# Altium PCB PCB1.PcbDoc
Units mil, origin at the board's own origin, x right, y up, seen from the top; angles counter-clockwise.
Board outline 1450 x 2400 mil, 2 copper layers (Top Layer, Bottom Layer); 6 components, 10 nets, 66 pads, 0 vias.
Unrouted connection lines stored in the file: 2.
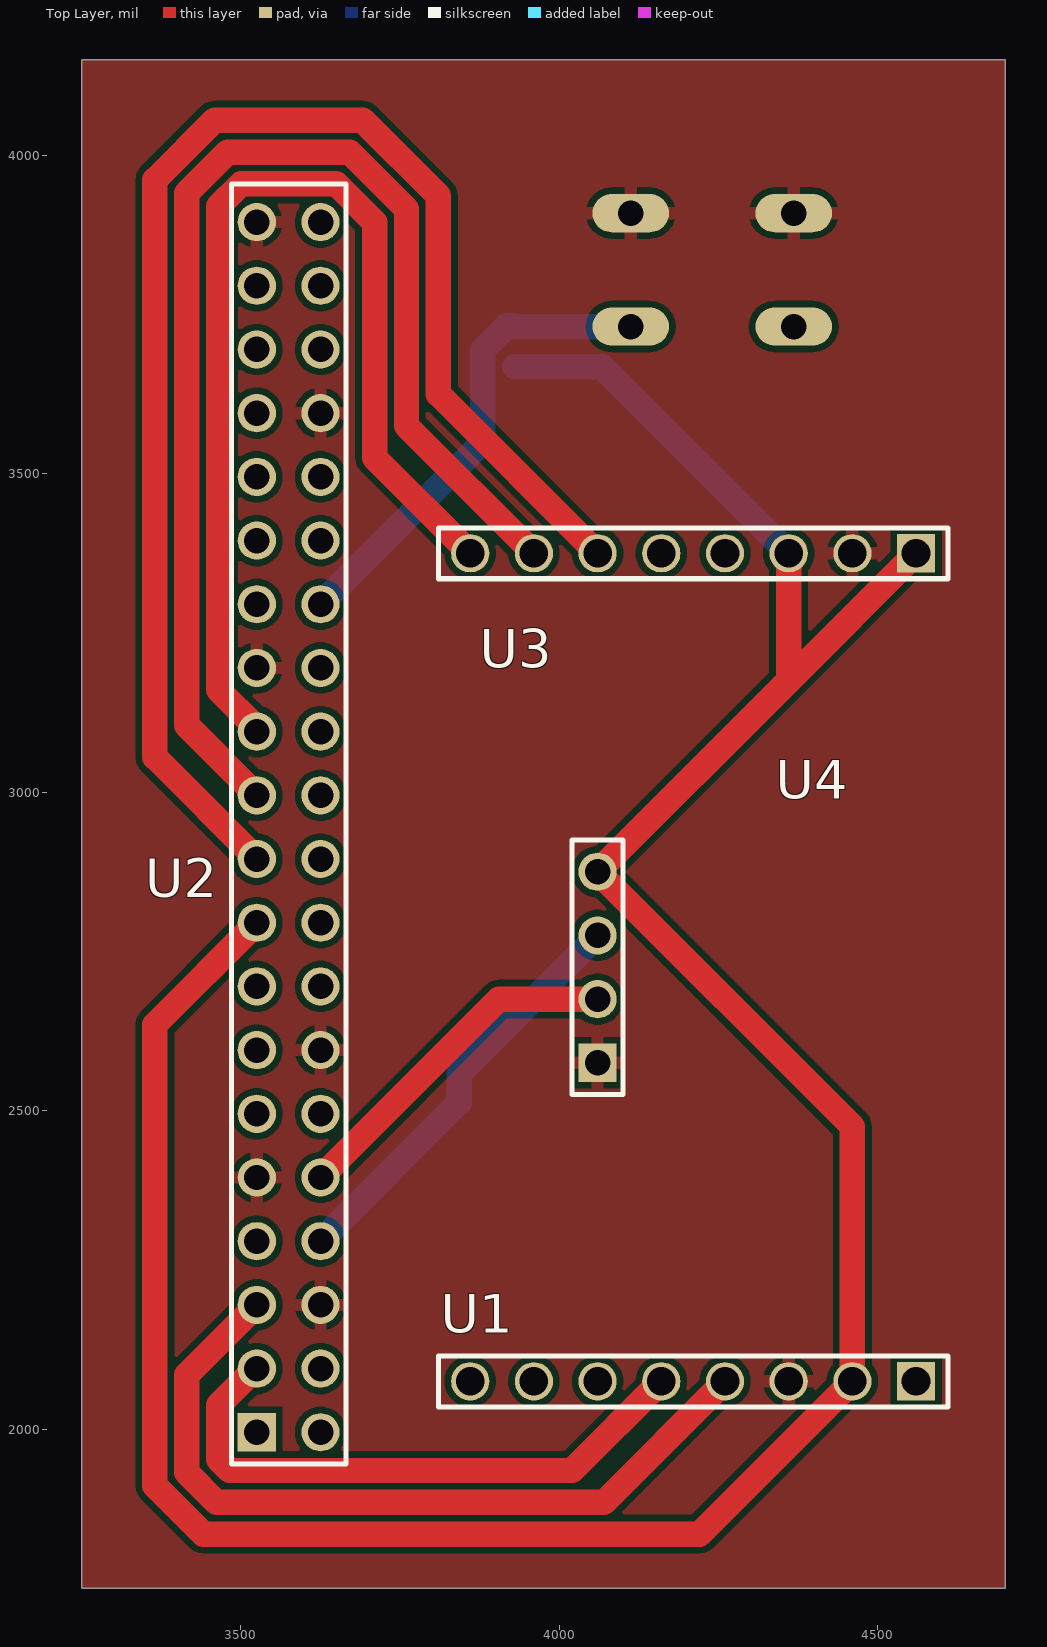
[diagram p0: Top Layer view]
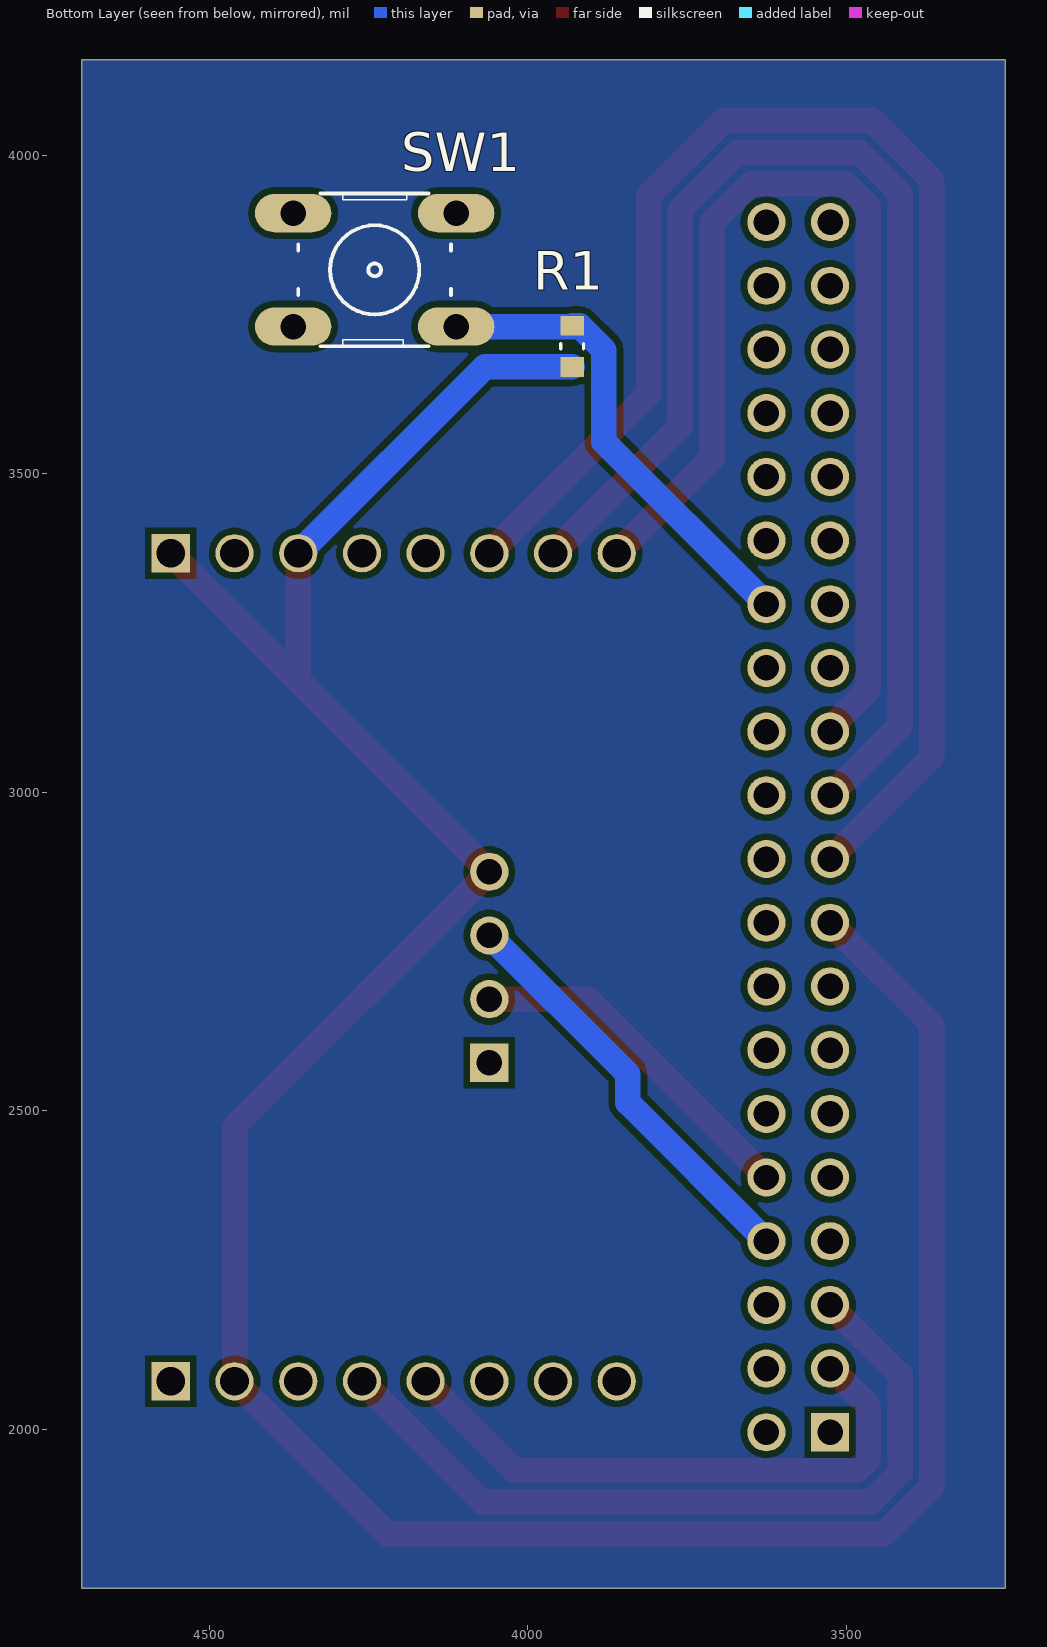
[diagram p1: Bottom Layer view, seen from below]
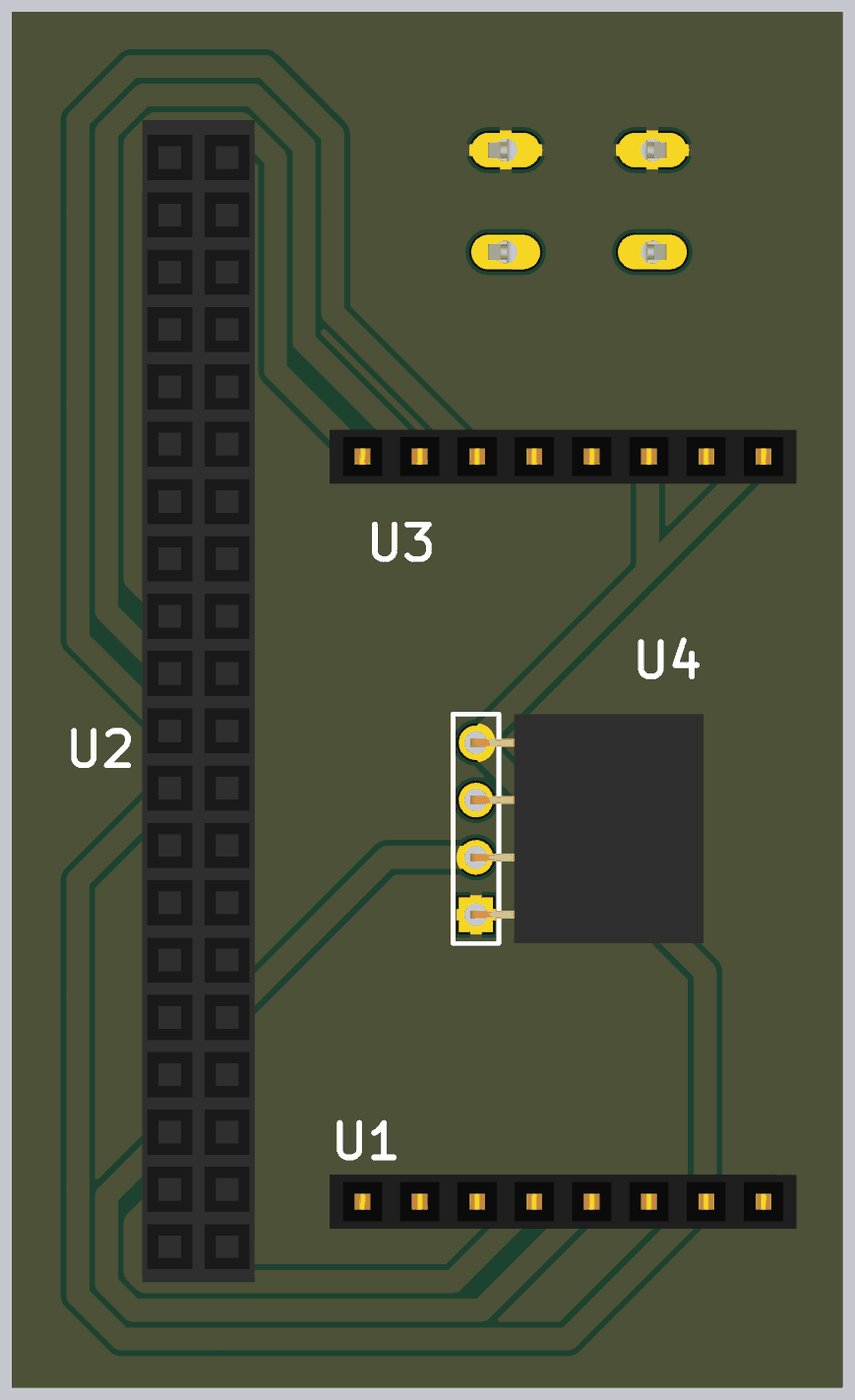
[diagram p2: 3D render of the assembled board from above, using the file's embedded part models]

## Layer stack, top to bottom
Top Solder: solder mask 0.4, Solder Resist, Dk 3.5
Top Layer: signal copper 1.4
Dielectric 1: dielectric 12.6, FR-4, Dk 4.8
Bottom Layer: signal copper 1.4
Bottom Solder: solder mask 0.4, Solder Resist, Dk 3.5

## Board outline
3250,1750 3250,4150 4700,4150 4700,1750

## Design rules (kind name [scope] priority, off if disabled: settings)
Clearance [All] p1: gap=10 ignorepadtopadclearanceinfootprint=FALSE except(0: Arc-Hole Track-Hole SMDPad-Hole THPad-Hole Via-Hole Fill-Hole Poly-Hole Region-Hole Text-Hole)
PlaneConnect [All] p1: planeconnectstyle=Relief reliefexpansion=20 reliefentries=4 reliefconductorwidth=20 reliefairgap=10
PolygonConnect [All] p1: connectstyle=Relief reliefconductorwidth=20 reliefentries=4 polygonreliefangle="90 Angle" airgapwidth=10
RoomDefinition Sheet1 [InComponentClass('Sheet1')] p1: confinementstyle=ConfineIn formatcopy=TRUE lockcomponents=FALSE outline 0,0 2000,0 2000,1000 0,1000
RoutingVias [All] p1: holewidth=28 width=50 viastyle="Through Hole" minholewidth=28 minwidth=50 maxholewidth=28 maxwidth=50
SolderMaskExpansion [All] p1: expansion=4 istentingtop=FALSE
Width [All] p1: maxlimit=100 minlimit=10 preferedwidth=40 minimp=50.000000 maximp=50.000000 favimp=50.000000
29 further rules are at their usual default settings.

## Components (designator, comment, footprint, x,y, rotation, side; value= is the part's Value field where it differs from the comment)
R1 "RT0603FRD0710KL" RESC1608X55N 3930,3700 r270 bottom
SW1 "SKHHANA010" SW_SKHHANA010 4240,3820 r180 bottom
U1 "GY-87" single8pinfemale 4560,2075 r90 top
U2 "beagleYAI" 40pinfemale 3525,1995 r0 top
U3 "ADXL345" single8pinfemale 4560,3375 r90 top
U4 "neo6m" single4pinfemale 4060,2575 r0 top

## Footprints (in the part's own frame and the unit in brackets; to place one, negate y for a bottom-side part, rotate by r counter-clockwise, add the part's x,y. Pads: shape width x height; smd on the part's side, far side on the other; paste and mask are expansions set on the pad)
40pinfemale [mil]
  rect 60x60 hole 40: 1(0,0)
  round 60 hole 40: 2(100,0) 3(0,100) 4(100,100) 5(0,200) 6(100,200) 7(0,300) 8(100,300) 9(0,400) 10(100,400) 11(0,500) 12(100,500) 13(0,600) 14(100,600) 15(0,700) 16(100,700) 17(0,800) 18(100,800) 19(0,900) 20(100,900) 21(0,1000) 22(100,1000) 23(0,1100) 24(100,1100) 25(0,1200) 26(100,1200) 27(0,1300) 28(100,1300) 29(0,1400) 30(100,1400) 31(0,1500) 32(100,1500) 33(0,1600) 34(100,1600) 35(0,1700) 36(100,1700) 37(0,1800) 38(100,1800) 39(0,1900) 40(100,1900)
  silkscreen extent -40,-50 140,1960, body extent -48,-61 149,1967, height 539
RESC1608X55N [mm]
  rect 0.79x0.93 smd: 1(-0.82,0) 2(0.82,0)
  silkscreen extent -0.11,-0.45 0.11,0.45, body extent -0.83,-0.4 0.77,0.4, height 0.55
single4pinfemale [mil]
  rect 60x60 hole 40: 1(0,0)
  round 60 hole 40: 2(0,100) 3(0,200) 4(0,300)
  silkscreen extent -40,-50 40,350, body extent -10,-50 398,350, height 100
single8pinfemale [mil]
  rect 60x60 hole 45: 1(0,0)
  round 60 hole 45: 2(0,100) 3(0,200) 4(0,300) 5(0,400) 6(0,500) 7(0,600) 8(0,700)
  silkscreen extent -40,-50 40,750, body extent -48,-60 46,756, height 335
SW_SKHHANA010 [mil]
  oval 120x60 hole 40: 1(-128,89) 2(128,89) 3(-128,-89) 4(128,-89)
  silkscreen extent -120,-120 120,120, body extent -153,-122 159,122, height 374

## Part data
R1: "Res Thin Film 0603 10K Ohm 1% 0.1W(1/10W) Â±25ppm/C Molded SMD Paper T/R", Package="1608 Yageo", Check_prices=https://www.snapeda.com/parts/RT0603FRD0710KL/Yageo/view-part/?ref=eda, MF=Yageo, MP=RT0603FRD0710KL, SnapEDA_Link=https://www.snapeda.com/parts/RT0603FRD0710KL/Yageo/view-part/?ref=snap
SW1: "Switch Tactile N.O. SPST Round Button PC Pins 0.05A 12VDC 0.98N Thru-Hole Bulk", Package=None, Check_prices=https://www.snapeda.com/parts/SKHHANA010/ALPS/view-part/?ref=eda, MF=ALPS, MP=SKHHANA010, SnapEDA_Link=https://www.snapeda.com/parts/SKHHANA010/ALPS/view-part/?ref=snap
U1 U2 U3 U4: ComponentLink1Description=Purchase, ComponentLink2Description=Datasheet

## Nets (pads, with @x,y where several pads share a name; then routed paths per layer and width w, separated by ;. In a path a pad name is that pad's centre, name@x,y a point inside that pad or via, vN(x,y) a via of type N, cw(c..) or ccw(c..) an arc to the next point about the centre after c; other vN are vias at no path point)
GND: SW1.1 SW1.2 U1.3 U2.6 U2.9 U2.14 U2.25 U2.34 U2.39 U3.2 U4.1
NetR1_1: R1.1 SW1.4 U2.28 | length 753
  Bottom Layer w40: U2.28 3880,3550 3880,3694 3918.28,3732.28 R1.1 3931.28,3731 SW1.4
NetU1_4: U1.4 U2.5 | length 1251.8
  Top Layer w40: U2.5 3415,2085 3415,1931.86 3461.86,1885 4070,1885 U1.4
NetU1_5: U1.5 U2.3 | length 929
  Top Layer w40: U2.3 3522.57,2095 3465,2037.43 3465,1952.57 3482.57,1935 4020,1935 U1.5
NetU2_8: U2.8 U4.3 | length 660.2
  Bottom Layer w40: U2.8 3842.5,2512.5 3842.5,2557.5 U4.3
NetU2_10: U2.10 U4.2 | length 551
  Top Layer w40: U2.10 3905,2675 U4.2
NetU2_19: U2.19 U3.6 | length 2330.4
  Top Layer w40: U2.19 3365,3055 3365,3961.27 3458.73,4055 3691.27,4055 3810,3936.27 3810,3625 U3.6
NetU2_21: U2.21 U3.7 | length 2023.3
  Top Layer w40: U2.21 3415,3105 3415,3940.56 3479.44,4005 3670.56,4005 3760,3915.56 3760,3575 U3.7
NetU2_23: U2.23 U3.8 | length 1716.2
  Top Layer w40: U2.23 3525,3100.41 3465,3160.41 3465,3919.85 3500.15,3955 3649.85,3955 3710,3894.85 3710,3525 U3.8
VCC: R1.2 U1.2 U2.17 U3.1 U3.3 U4.4 | length 4600.1
  Top Layer w40: U2.17 3365,2635 3365,1911.15 3441.15,1835 4220,1835 U1.2 4460,2475 U4.4 4360,3175 ; U3.3 4360,3175 ; U3.1 4360,3175
  Bottom Layer w40: R1.2 4067.28,3667.72 U3.3
pads on no net: SW1.3 U1.1 U1.6 U1.7 U1.8 U2.1 U2.2 U2.4 U2.7 U2.11 U2.12 U2.13 U2.15 U2.16 U2.18 U2.20 U2.22 U2.24 U2.26 U2.27 U2.29 U2.30 U2.31 U2.32 U2.33 U2.35 U2.36 U2.37 U2.38 U2.40 U3.4 U3.5

## Polygon pours and split planes (outlines as drawn)
GND on Top Layer "GND_L01_P000" (solid, pour order 0): 3250,1750 4700,1750 4700,4150 3250,4150
no net on Bottom Layer "NONET_L02_P001" (solid, pour order 1): 3250,4150 4700,4150 4700,1750 3250,1750

## Text inside footprints (layer, text, board x,y; h text height)
SW1: Mechanical 13 "1" at 4410.13,3885.05 h50.04; Mechanical 13 "2" at 4099.79,3880.09 h50.08; Mechanical 13 "3" at 4420.16,3709.9 h50.04; Mechanical 13 "4" at 4099.86,3709.89 h50.05